# Altium PCB ST-LINK-PCB.PcbDoc
Units mil, origin at the board's own origin, x right, y up, seen from the top; angles counter-clockwise.
Board outline 1968.5 x 590.55 mil, 4 copper layers (Top Layer, GND02, VCC03, Bottom Layer), stack 23.756 mil thick; 54 components, 49 nets, 187 pads, 104 vias.
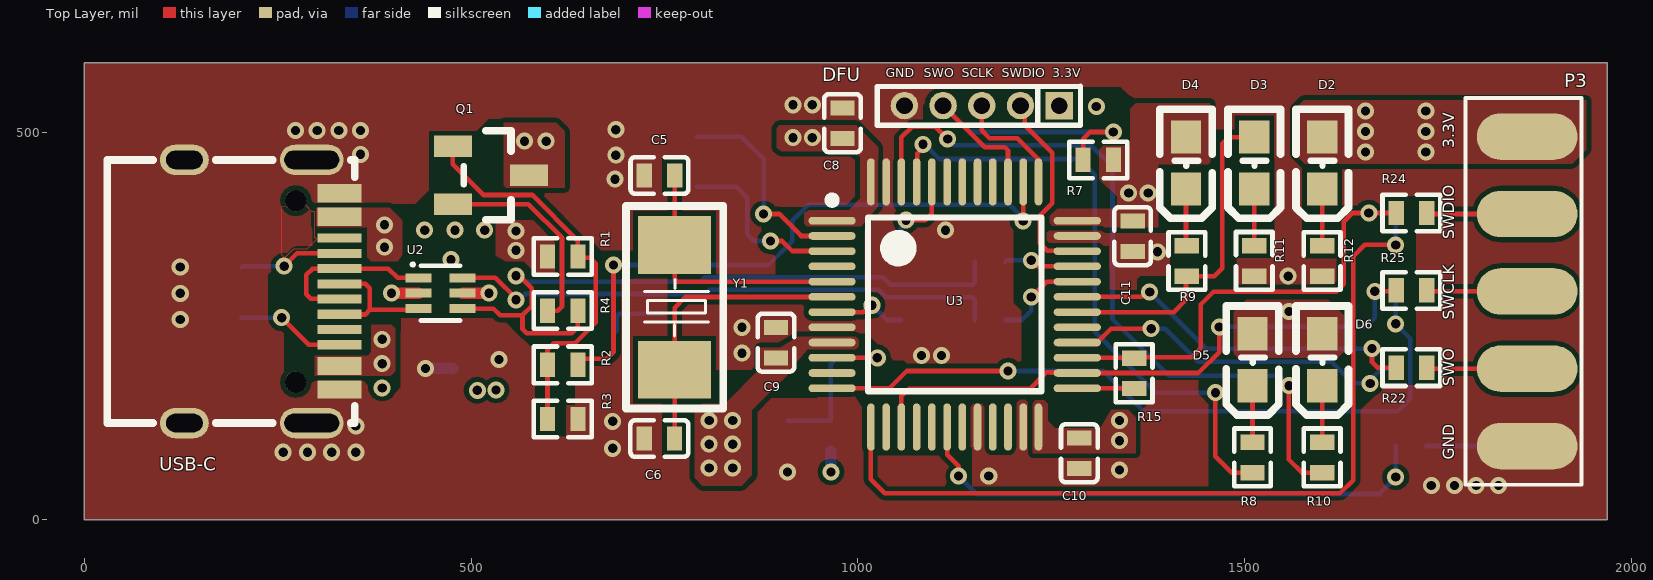
[diagram p0: Top Layer view]
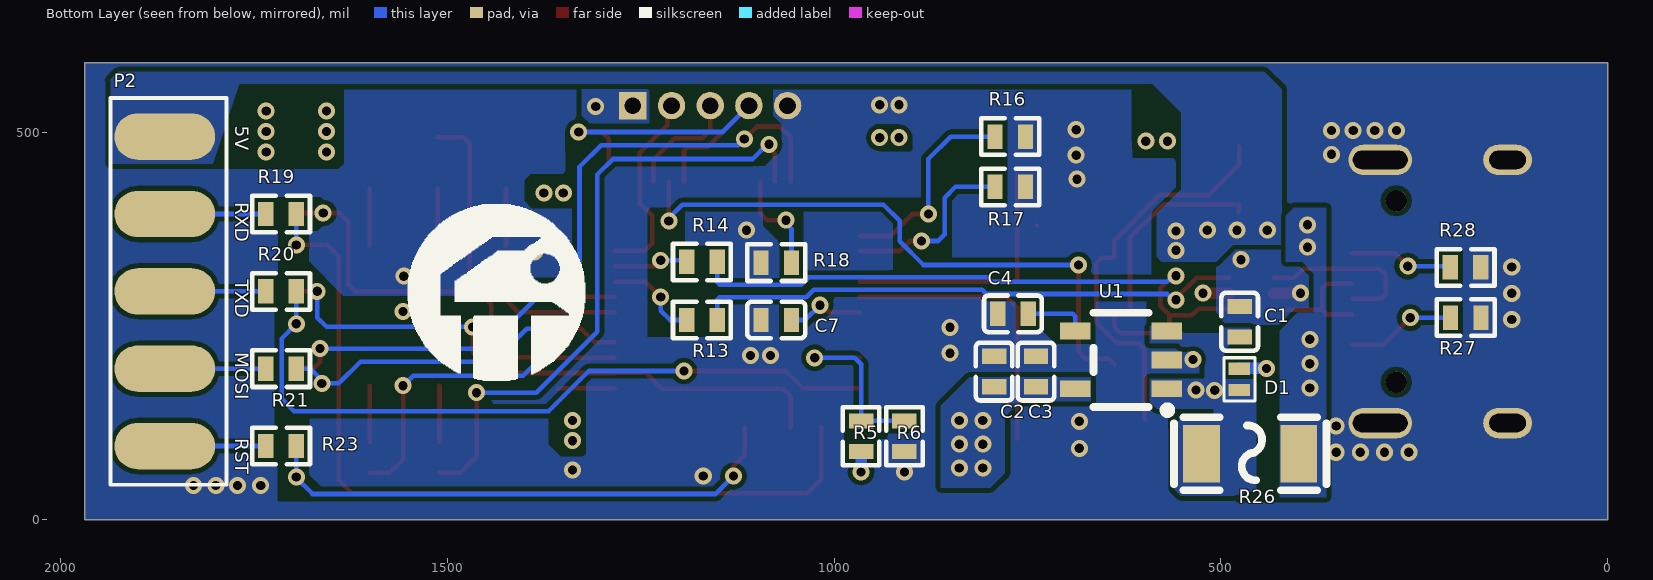
[diagram p1: Bottom Layer view, seen from below]
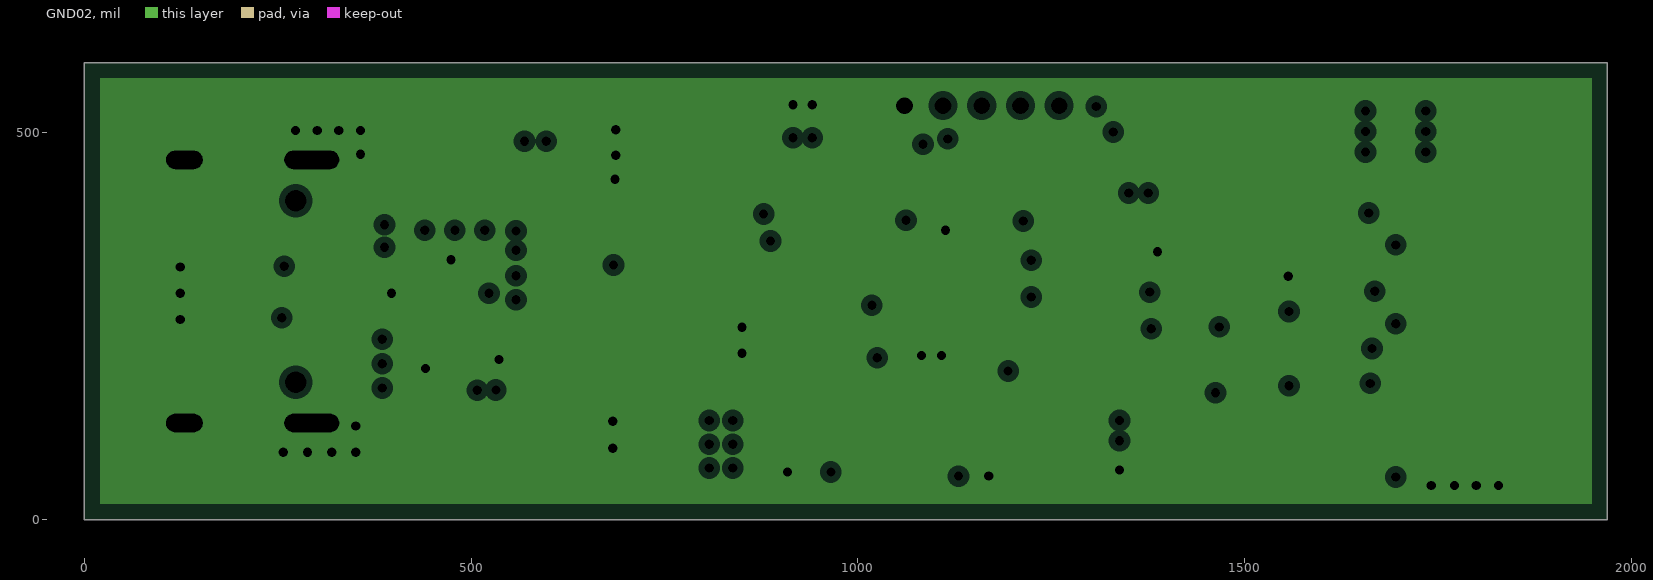
[diagram p2: GND02, clearances drawn from the general rule]
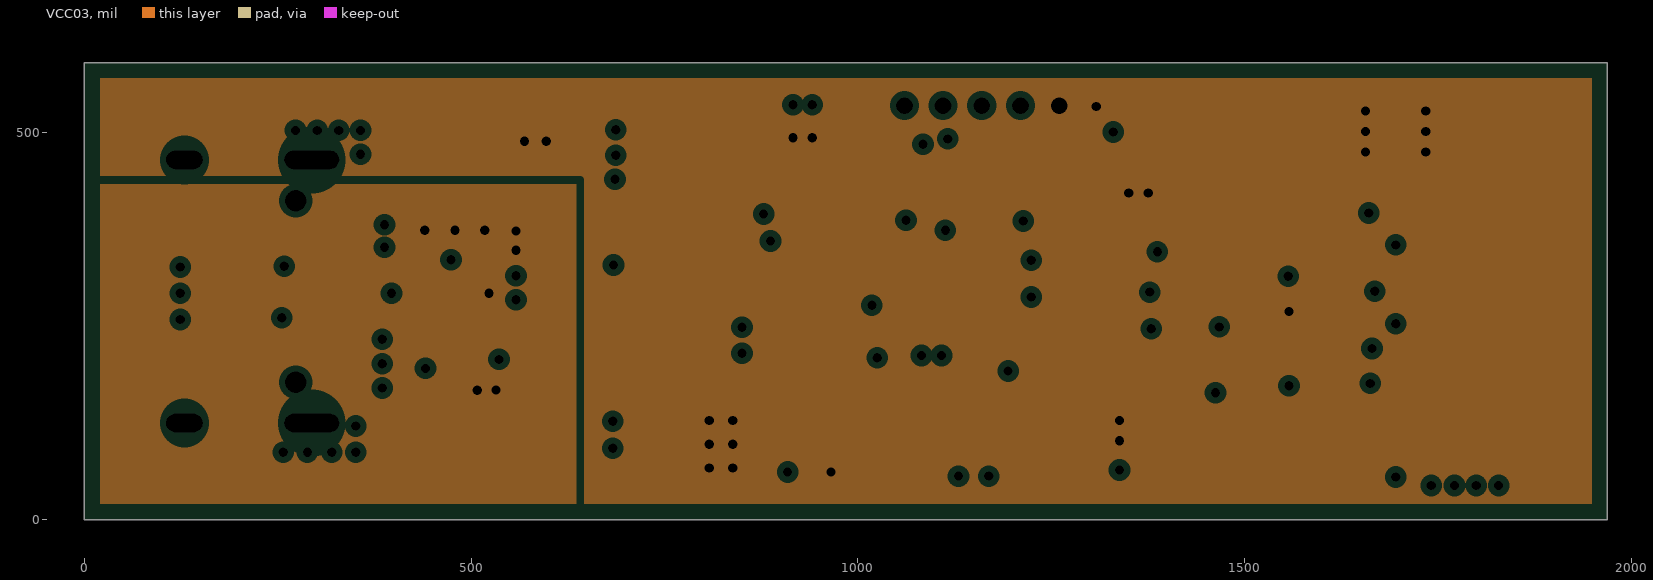
[diagram p3: VCC03, clearances drawn from the general rule]

## Layer stack, top to bottom
Top Solder: solder mask 0.4, Solder Resist, Dk 3.5
Top Layer: signal copper 1.4
Dielectric 2: prepreg 2.8, PP-006, Dk 4.1
GND02: plane copper 1.3779, net GND
Dielectric 1: dielectric 12.6, FR-4, Dk 4.8
VCC03: plane copper 1.3779, net (Multiple Nets)
Dielectric 3: prepreg 2.8, PP-006, Dk 4.1
Bottom Layer: signal copper 1.4
Bottom Solder: solder mask 0.4, Solder Resist, Dk 3.5

## Board outline
0,0 1968.5,0 1968.5,590.55 0,590.55

## Design rules (kind name [scope] priority, off if disabled: settings)
Clearance [All] p1: gap=6 ignorepadtopadclearanceinfootprint=FALSE
DiffPairsRouting [All] p1: maxlimit=10 minlimit=10 mostfreqgap=10 toplayer_minwidth=6 toplayer_maxwidth=6 toplayer_prefwidth=6 bottomlayer_minwidth=6 bottomlayer_maxwidth=6 bottomlayer_prefwidth=6 maxuncoupledlength=500
PlaneClearance [All] p1: clearance=8
PlaneConnect [All] p1: planeconnectstyle=Direct reliefexpansion=20 reliefentries=4 reliefconductorwidth=10 reliefairgap=10
PolygonConnect [All] p1: connectstyle=Direct reliefconductorwidth=10 reliefentries=4 polygonreliefangle="90 Angle" airgapwidth=10
RoutingVias [All] p1: holewidth=12 width=22 viastyle="Through Hole" minholewidth=12 minwidth=22 maxholewidth=12 maxwidth=22
SilkToSilkClearance [All] p1: silktosilkclearance=2
SilkToSolderMaskClearance [IsPad] p1: minsilkscreentomaskgap=2 clearancetoexposedcopper=TRUE
SolderMaskExpansion [All] p1: expansion=4
Width PWR [InNetClass('PWR')] p1: maxlimit=60 minlimit=6 preferedwidth=15
Width [InNetClass('All Nets')] p2: maxlimit=6 minlimit=6 preferedwidth=6
25 further rules are at their usual default settings.

## Classes and differential pairs
net class PWR: 3.3V 5V GND VBUS
differential pair USB: +USB_P -USB_N

## Components (designator, comment, footprint, x,y, rotation, side; value= is the part's Value field where it differs from the comment)
C1 "Cap" 0402C 475.63,256.04 r270 bottom value=0.1uF
C2 "Cap" 0402C 793,191.67 r270 bottom value=0.1uF
C3 "Cap" 0402C 739,191.67 r270 bottom value=0.1uF
C4 "Cap" 0402C 769.04,266 r180 bottom value=0.1uF
C5 "Cap" 0402C 743,444.74 r0 top value=22pF
C6 "Cap" 0402C 742.96,104.74 r0 top value=22pF
C7 "Cap" 0402C 1075.04,258 r180 bottom value=0.1uF
C8 "Cap" 0402C 980,512.67 r270 top value=0.1uF
C9 "Cap" 0402C 894,229 r270 top value=0.1uF
C10 "Cap" 0402C 1286,85.33 r90 top value=0.1uF
C11 "Cap" 0402C 1355,365.96 r90 top value=0.1uF
D1 "DESD5V0S1BL-7B" DESD5V0S1BL-7B 476,181.27 r90 bottom
D2 "LED" 0603LED 1600,464.37 r90 top
D3 "LED" 0603LED 1512.18,464.37 r90 top
D4 "LED" 0603LED 1424,464.37 r90 top
D5 "LED" 0603LED 1510,210 r90 top
D6 "LED" 0603LED 1600,210 r90 top
DFU "P_TOP" SIP5-1.27 1210,535 r0 top
P2 "P_BOTTOM" "HEADER 5" 1865,495 r270 bottom
P3 "P_TOP" "HEADER 5" 1865,95 r90 top
Q1 "S9013_NPN" SOT-23-3 519.61,442.48 r180 top
R1 "Res1" 0402R 617.96,340.06 r0 top value=10K
R2 "Res1" 0402R 617.96,200.06 r0 top value=100R
R3 "Res1" 0402R 617.96,130.06 r0 top value=36K
R4 "Res1" 0402R 617.96,270.06 r0 top value=1.5K
R5 "Res2" 0402R 965,108.17 r270 bottom value=4.7K
R6 "Res2" 0402R 909,107.46 r90 bottom value=4.7K
R7 "Res2" 0402R 1310.33,464.92 r0 top value=4.7K
R8 "Res2" 0402R 1510,79.96 r90 top value=1K
R9 "Res2" 0402R 1425,334.53 r270 top value=1.5K
R10 "Res2" 0402R 1600,79.96 r90 top value=1K
R11 "Res2" 0402R 1512.18,333.96 r90 top value=1.5K
R12 "Res2" 0402R 1600,333.82 r90 top value=1K
R13 "Res2" 0402R 1170.33,258 r0 bottom value=22R
R14 "Res2" 0402R 1170.33,333 r0 bottom value=22R
R15 "Res2" 0402R 1357,189.3 r270 top value=100R
R16 "Res1" 0402R 772.67,495 r180 bottom value=10K
R17 "Res1" 0402R 772.67,430 r180 bottom value=10K
R18 "Res2" 0402R 1075.04,332 r180 bottom value=10K
R19 "Res2" 0402R 1714.33,395 r0 bottom value=22R
R20 "Res2" 0402R 1714.33,295 r0 bottom value=22R
R21 "Res2" 0402R 1714.33,195 r0 bottom value=22R
R22 "Res2" 0402R 1714.96,196.3 r0 top value=22R
R23 "Res2" 0402R 1714.33,95 r0 bottom value=22R
R24 "Res2" 0402R 1714.96,396.3 r0 top value=22R
R25 "Res2" 0402R 1714.96,296.3 r0 top value=22R
R26 "PTC 1A" PTC_1A 463.78,84.51 r0 bottom
R27 "Res2" 0402R 182.96,261 r0 bottom value=5.1K
R28 "Res2" 0402R 183.33,325.99 r0 bottom value=5.1K
U1 "SPX3819" SPX3819 630.31,206.4 r0 bottom
U2 "USBLC6-2P6" USBLC6-2P6 460.75,290.97 r0 top
U3 "STM32F103CBT6" LQFP48_L 1125,278 r0 top
USB-C "TYPEC-304-BCP16" TYPE-C-16P 179.7,295.35 r270 top
Y1 "XTAL_8M" SMD-5032_2P 763,273.44 r90 top

## Footprints (in the part's own frame and the unit in brackets; to place one, negate y for a bottom-side part, rotate by r counter-clockwise, add the part's x,y. Pads: shape width x height; smd on the part's side, far side on the other; paste and mask are expansions set on the pad)
0402C [mm] "0402C"
  rect 0.5x0.8 smd: 1(-0.491,0) 2(0.509,0)
  silkscreen extent -0.94,-0.6 0.96,0.6
0402R [mm] "0402R"
  rect 0.5x0.8 smd: 1(-0.491,0) 2(0.509,0)
  silkscreen extent -0.94,-0.6 0.96,0.6
0603LED [mil] "0603LED"
  rect 43x39 smd: 1(30,0) 2(-37,0)
  silkscreen extent -75,-34 66,34
DESD5V0S1BL-7B [mm] "1CHANNEL_ESD"
  rect 0.4x0.7 smd: 1(-0.351,0) 2(0.349,0)
  silkscreen extent -0.71,-0.51 0.71,0.51
"HEADER 5" [mil]
  oval 60x130 smd: 1(0,0) 2(100,0) 3(200,0) 4(300,0) 5(400,0)
  silkscreen extent -50,-70 450,80, body extent -50,-406 450,48, height 70
LQFP48_L [mm] "Thin QFP, 48-Leads, Body 7x7mm, Pitch 0.5mm, IPC High Density"
  oval 1.55x0.25 smd: 1(-4.025,2.75) 2(-4.025,2.25) 3(-4.025,1.75) 4(-4.025,1.25) 5(-4.025,0.75) 6(-4.025,0.25) 7(-4.025,-0.25) 8(-4.025,-0.75) 9(-4.025,-1.25) 10(-4.025,-1.75) 11(-4.025,-2.25) 12(-4.025,-2.75) 25(4.025,-2.75) 26(4.025,-2.25) 27(4.025,-1.75) 28(4.025,-1.25) 29(4.025,-0.75) 30(4.025,-0.25) 31(4.025,0.25) 32(4.025,0.75) 33(4.025,1.25) 34(4.025,1.75) 35(4.025,2.25) 36(4.025,2.75)
  oval 0.25x1.55 smd: 13(-2.75,-4.025) 14(-2.25,-4.025) 15(-1.75,-4.025) 16(-1.25,-4.025) 17(-0.75,-4.025) 18(-0.25,-4.025) 19(0.25,-4.025) 20(0.75,-4.025) 21(1.25,-4.025) 22(1.75,-4.025) 23(2.25,-4.025) 24(2.75,-4.025) 37(2.75,4.025) 38(2.25,4.025) 39(1.75,4.025) 40(1.25,4.025) 41(0.75,4.025) 42(0.25,4.025) 43(-0.25,4.025) 44(-0.75,4.025) 45(-1.25,4.025) 46(-1.75,4.025) 47(-2.25,4.025) 48(-2.75,4.025)
  silkscreen extent -4.15,-2.85 2.85,3.55, body extent -3.5,-3.5 3.5,3.5, height 1.6
PTC_1A [mm] "PTC_1A"
  rect 1.2x1.9 smd: 1(-1.645,-0.012) 2(1.555,-0.012)
  silkscreen extent -2.55,-1.21 2.45,1.19
SIP5-1.27 [mm]
  rect 0.9x0.9 hole 0.55: 1(1.27,0)
  round 0.9 hole 0.55: 2(0,0) 3(-1.27,0) 4(-2.54,0) 5(-3.81,0)
  silkscreen extent -4.7,-0.64 1.97,0.64
SMD-5032_2P [mm] "8M XTAL"
  rect 1.9x2.4 smd: 1(-2.027,0) 2(2.073,0)
  silkscreen extent -3.3,-1.6 3.35,1.6
SOT-23-3 [mm] "S9013_NPN"
  rect 1.25x0.7 smd: 1(1.092,-1.014) 2(1.092,0.886) 3(-1.407,-0.064)
  silkscreen extent -0.81,-1.52 0.74,1.4
SPX3819 [mm] "SPX3819_5VTO3V3_LDO"
  rect 1x0.55 smd: 1(-1.532,0.95) 2(-1.532,0) 3(-1.532,-0.95) 4(1.468,-0.95) 5(1.468,0.95)
  silkscreen extent -1.68,-1.55 0.87,1.78
TYPE-C-16P [mm] "TYPE-C-16P"
  oval 1x2.099 hole 0.6 slot 1.8 at 90 deg: 13(-4.307,2.903) 14(4.333,2.903)
  oval 1x1.599 hole 0.6 slot 1.2 at 90 deg: 15(-4.307,-1.277) 16(4.333,-1.277)
  rect 0.6x1.45 smd: A1B12(-3.212,3.817) A4B9(-2.437,3.817) B1A12(3.233,3.817) B4A9(2.463,3.817)
  rect 0.3x1.45 smd: A5(-1.238,3.818) A6(-0.237,3.817) A7(0.263,3.817) A8(1.263,3.817) B5(1.763,3.817) B6(0.763,3.817) B7(-0.737,3.817) B8(-1.737,3.817)
  round 0.7 hole 0.7 unplated: ""(-2.967,2.372) ""(2.993,2.372)
  silkscreen extent -4.3,-3.81 4.33,4.32
USBLC6-2P6 [mm] "ESD PROTECTION"
  rect 0.85x0.3 smd: 1(-0.732,0.544) 2(-0.732,0.044) 3(-0.732,-0.456) 4(0.718,-0.456) 5(0.718,0.044) 6(0.718,0.544)
  silkscreen extent -0.92,-0.86 0.64,0.98

## Part data
C1 C2 C3 C4 C5 C6 C7 C8 C9 C10 C11: "Capacitor", LatestRevisionDate=17-Jul-2002, LatestRevisionNote="Re-released for DXP Platform.", PackageDescription="Radial Cap, Thru-Hole; 2 Leads; 0.3 in Pin Spacing", PackageReference=RAD-0.3, Published=8-Jun-2000, Publisher="Altium Limited"
D1: "1CHANNEL ESD"
D2 D3 D4 D5 D6: "Typical RED, GREEN, YELLOW, AMBER GaAs LED", LatestRevisionDate=17-Jul-2002, LatestRevisionNote="Re-released for DXP Platform.", PackageDescription="SM LED; 2 Flat Leads", PackageReference=3.2X1.6X1.1, PackageVersion=Feb-2002, Published=8-Jun-2000, Publisher="Altium Limited"
DFU P2 P3: library part "Header 5", "Header, 5-Pin", LatestRevisionDate=17-Jul-2002, LatestRevisionNote="Re-released for DXP Platform.", Publisher="Altium Limited"
Q1: library part S9013, PackageDocument=Sep-1998, Code_JEDEC=TO-92A, DatasheetDocument=1997, LatestRevisionDate=15-Jan-2003, LatestRevisionNote="PCB Footprint 'BCY-W3/D4.7' replaced", PackageReference=TO-92A, Published=8-Jun-2000, Publisher="Altium Limited"
R1 R2 R3 R4 R16 R17: "贴片电阻", LatestRevisionDate=17-Jul-2002, LatestRevisionNote="Re-released for DXP Platform.", PackageReference=AXIAL-0.4, Published=8-Jun-2000, Publisher="Altium Limited"
R5 R6 R7 R8 R9 R10 R11 R12 R13 R14 R15 R18 R19 R20 R21 R22 R23 R24 R25: "Resistor", LatestRevisionDate=17-Jul-2002, LatestRevisionNote="Re-released for DXP Platform.", PackageDescription="Axial Device, Thru-Hole; 2 Leads; 0.4 in Pin Spacing", PackageReference=AXIAL-0.4, Published=8-Jun-2000, Publisher="Altium Limited"
R26: library part PTC保险
R27 R28: library part Res, "Resistor", LatestRevisionDate=17-Jul-2002, LatestRevisionNote="Re-released for DXP Platform.", PackageDescription="Axial Device, Thru-Hole; 2 Leads; 0.4 in Pin Spacing", PackageReference=AXIAL-0.4, Published=8-Jun-2000, Publisher="Altium Limited"
U1: "SPX3819_5VTO3V3_LDO"
U2: "ESD PROTECTION"
U3: "STM32 ARM-based 32-bit MCU with 128 Kbytes Flash, 48-pin LQFP, Industrial Temperature", ComponentLink1Description="Manufacturer Link", ComponentLink1URL=www.st.com/stm32, ComponentLink2Description=Datasheet, ComponentLink2URL=http://www.st.com/stonline/products/literature/ds/13587.pdf, DatasheetVersion="rev6, Mar-2008", PackageDescription="48-Pin Low-Profile Quad Flat Pack, 7 x 7 mm Body, 0.5 mm Pitch (LQFP48)", PackageReference=LQFP48, PackageVersion=Mar-2008, Published=30-May-2008, Publisher="Altium Limited"
USB-C: "TYPEC-16P"
Y1: library part XTAL

## Via types
v1: diameter 22, hole 12, Top Layer to Bottom Layer, tented both sides, 104 vias

## Nets (pads, with @x,y where several pads share a name; then routed paths per layer and width w, separated by ;. In a path a pad name is that pad's centre, name@x,y a point inside that pad or via, vN(x,y) a via of type N, cw(c..) or ccw(c..) an arc to the next point about the centre after c; other vN are vias at no path point)
3.3V: C2.2 C3.2 C8.2 C9.2 C10.2 C11.2 D2.1 D4.1 D5.1 D6.1 DFU.1 P3.5 Q1.3 R5.2 R7.2 U1.5 U3.1 U3.9 U3.24 U3.36 U3.48 | length 26.6
  Bottom Layer w15: v1(965,61.5) R5.2
  other v1: 807.65,66.75 838,66.75 807.65,97.38 838,97.38 1338.05,102 807.65,128 838,128 1338.05,128 1557,269 1349.88,422 1375,422 1656,475 1734,475 569,489 597,489 916,493.57 941,493.57 1656,501.5 1734,501.5 1656,528 1734,528 1308,534
5V: C1.2 D1.1 P2.1 R1.1 R26.2 U1.1 U1.3 U2.5 | length 34
  Top Layer w15: U2.5 v1(523,292.69)
  other v1: 508,167 532,167.44 558,348 558,373 440,374 479,374 517.5,374
BOOT0: R18.2 U3.44 | length 135.9
  Top Layer w6: v1(1062,387) 1087,387 1095.47,395.47 U3.44
  Bottom Layer w6: R18.2 1055,375.67 1062,382.67 v1(1062,387)
D+: U2.3 USB-C.A6 USB-C.B6 | length 175
  Top Layer w6: USB-C.B6 330.32,265 363,265 369,271 ; USB-C.A6 330.31,305 363,305 369,299 369,271 ; U2.3 429.91,271 369,271
D-: U2.1 USB-C.A7 USB-C.B7 | length 223.3
  Top Layer w6: USB-C.A7@329.46,285.54 292.46,285.54 287,291 287,316.37 295,324.37 USB-C.B7 393,324.37 405,312.37 U2.1
GND: C1.1 C2.1 C3.1 C4.1 C5.1 C6.1 C7.1 C8.1 C9.1 C10.1 C11.1 D1.2 DFU.5 P3.1 R3.2 R6.1 R11.1 R12.1 R16.2 R17.2 R18.1 R27.1 R28.1 U1.2 U2.2 U3.8 U3.20 U3.23 U3.35 U3.47 USB-C.13 USB-C.14 USB-C.15 USB-C.16 USB-C.A1B12 USB-C.B1A12 | length 70.1
  Top Layer w15: v1(397,292.69) U2.2
  Bottom Layer w15: v1(441,195.37) 475.63,195.37 D1.2
  other v1: 1741,44 1771,44 1799,44 1828,44 1169,56.19 909,61.5 1338,64 257,87 288.33,87 319.67,87 351,87 683,92.15 351,121 683,127 536.04,207 1082,212.1 1107.9,212.1 850,215 850,248.4 124,258.5 124,292.5 1556.1,314.55 124,326.5 474,336 1387,346 1113,374 686,440 687,471 357,472 273,503 301,503 329,503 357,503 687,504 916,536 941,536
NetC4_2: C4.2 U1.4 | length 81
  Bottom Layer w6: U1.4 688.11,262.49 691.62,266 C4.2
NetC7_2: C7.2 U3.7 | length 100
  Top Layer w6: U3.7 1006.97,268.16 1015.81,277 v1(1018,277)
  Bottom Layer w6: v1(1018,277) 1037,258 C7.2
NetD2_2: D2.2 R12.2 | length 73.5
  Top Layer w6: R12.2 D2.2
NetD3_2: D3.2 R11.2 | length 73.4
  Top Layer w6: R11.2 D3.2
NetD4_2: D4.2 R9.1 | length 73.9
  Top Layer w6: D4.2 1424,354.86 R9.1
NetD5_2: D5.2 R8.2 | length 73
  Top Layer w6: R8.2 D5.2
NetD6_2: D6.2 R10.2 | length 73
  Top Layer w6: R10.2 D6.2
NetQ1_1: Q1.1 R1.2 R2.1 R3.1 | length 516.2
  Top Layer w6: Q1.1 476,481.8 476,459.31 515.71,419.6 578.84,419.6 638,360.44 R1.2 639.77,338.28 653.72,338.28 661,331 661,254.75 634.25,228 607,228 598.63,219.63 R2.1 R3.1
NetQ1_2: Q1.2 R4.1 | length 278.8
  Top Layer w6: Q1.2@477,397.5 477,407.2 Q1.2 573.87,407.6 617.47,364 617.47,275.47 612.06,270.06 R4.1
NetR5_1: R5.1 R6.2 U3.10 | length 251.3
  Top Layer w6: U3.10 v1(1025,209.1)
  Bottom Layer w6: R6.2 R5.1 965,201 973.1,209.1 v1(1025,209.1)
NetR13_2: R13.2 U3.32 | length 124
  Top Layer w6: v1(1224,287.65) 1243.87,307.53 U3.32
  Bottom Layer w6: R13.2 1212,258 1224,270 v1(1224,287.65)
NetR14_2: R14.2 U3.33 | length 97.1
  Top Layer w6: v1(1224,335) 1231.79,327.21 U3.33
  Bottom Layer w6: R14.2 1192.37,335 v1(1224,335)
NetR16_1: R16.1 U3.2 | length 269.3
  Top Layer w6: v1(878,395) 898,395 926.42,366.58 U3.2
  Bottom Layer w6: R16.1 849,495 878,466 v1(878,395)
NetR17_1: R17.1 U3.3 | length 236.5
  Top Layer w6: v1(887,360) 902.14,360 914.98,347.16 966.27,347.16 U3.3
  Bottom Layer w6: R17.1 843,430 857,416 857,369 866,360 v1(887,360)
NetR27_2: R27.2 USB-C.B5 | length 141.5
  Top Layer w6: v1(255.03,261) 290.08,225.94 USB-C.B5
  Bottom Layer w6: R27.2 v1(255.03,261)
NetR28_2: R28.2 USB-C.A5 | length 134.2
  Top Layer w6: v1(258.37,327.58) 274.89,344.1 329.81,344.1 329.92,344 USB-C.A5
  Bottom Layer w6: R28.2 204.97,327.58 v1(258.37,327.58)
OS_IN: C5.2 U3.5 Y1.2 | length 338.7
  Top Layer w6: Y1.2@738,380.06 Y1.2@738.04,380.1 ; Y1.2 763,311.04 766.51,307.53 U3.5 ; Y1.2 C5.2
OS_OUT: C6.2 U3.6 Y1.1 | length 378.5
  Top Layer w6: C6.2 Y1.1 763,274 776.65,287.65 966.35,287.65 U3.6
P_MOSI: P2.4 R21.2 | length 130.6
  Bottom Layer w6: R21.2 P2.4
P_NRST: P2.5 R23.2 | length 130.6
  Bottom Layer w6: R23.2 P2.5
P_RXD: P2.2 R19.2 | length 130.6
  Bottom Layer w6: R19.2 P2.2
P_SWCLK: P3.3 R25.2 | length 130.5
  Top Layer w6: R25.2 1736.3,295 P3.3
P_SWDIO: P3.4 R24.2 | length 130.5
  Top Layer w6: R24.2 1736.3,395 P3.4
P_SWO: P3.2 R22.2 | length 130.5
  Top Layer w6: R22.2 1736.3,195 P3.2
P_TXD: P2.3 R20.2 | length 130.6
  Bottom Layer w6: R20.2 P2.3
RX_LED: R10.1 U3.46 | length 963.9
  Top Layer w6: U3.46 1056.1,494.1 1070,508 1100,508 v1(1116,492) ; v1(1557,173) 1557,77.63 1574,60.63 R10.1
  Bottom Layer w6: v1(1116,492) 1124,484 1301,484 1329,456 1329,259 1402,186 1544,186 v1(1557,173)
STA_LED: D3.1 R9.2 U3.30 | length 434
  Top Layer w6: U3.30 1408.16,268.16 1424,284 1424,313.49 R9.2 1460.49,314.49 1471,325 1471,486 1479.37,494.37 D3.1
SWCLK0: DFU.3 U3.37 | length 150
  Top Layer w6: DFU.3 1160,503 1170,493 1206,493 1233.27,465.73 U3.37
SWDIO0: DFU.2 U3.34 | length 254.3
  Top Layer w6: DFU.2 1215.63,529.37 1215.63,509.4 1251,474.04 1251,408.92 1235,392.92 1235,357 1244.37,347.63 1282.73,347.63 U3.34
SWO0: DFU.4 R7.1 U3.39 | length 452.5
  Top Layer w6: DFU.4 1164,481 1189.9,481 1193.9,477 U3.39 U3.39@1193.9,436.28 ; R7.1 1291,492 1300,501 v1(1330,501)
  Bottom Layer w6: DFU.4 1144,501 v1(1330,501)
T_JTCK: R25.1 U3.15 U3.26 | length 775.7
  Top Layer w6: U3.15 1056.1,159.29 1066,169.19 1222.51,169.19 1243.51,190.19 1249.51,190.19 1249.55,190.15 1282.73,190.15 U3.26 1440,189.42 1467,216.42 v1(1467,249) ; v1(1668,295) 1694.33,295 R25.1
  Bottom Layer w6: v1(1467,249) 1656,249 1668,261 v1(1668,295)
T_JTMS: R15.1 R24.1 U3.27 | length 570.5
  Top Layer w6: U3.27 1356.53,209.1 R15.1 1358.37,210 1431.49,210 1443,221.51 1443,278 1459.55,294.55 1618.39,294.55 1628,304.16 1628,385 1639.3,396.3 v1(1660.3,396.3) R24.1
T_MOSI: R21.1 U3.28 | length 458.4
  Top Layer w6: U3.28@1283.64,228.96 1309.23,228.96 1326.99,246.72 v1(1379,246.72)
  Bottom Layer w6: v1(1379,246.72) 1397.28,246.72 1440,204 1612,204 1640,176 v1(1662,176) 1662,180.33 1676.67,195 R21.1
T_NRST: R23.1 U3.18 | length 693.9
  Top Layer w6: U3.18 1115.16,83.84 1130,69 v1(1130,56.19)
  Bottom Layer w6: v1(1130,56.19) 1153,33.19 1153,33 1674,33 1695,54 v1(1695,55) R23.1
T_RXD: R19.1 U3.13 | length 1095.8
  Top Layer w6: U3.13 1016.37,119.17 1016.37,52.37 1034.73,34 1623,34 1640,51 1640,340 1655,355 v1(1695,355)
  Bottom Layer w6: v1(1695,355) R19.1
T_SWDIO_IN: R15.2 U3.25 | length 73.7
  Top Layer w6: U3.25 1356.53,169.73 R15.2
T_SWO: R22.1 U3.31 | length 465.4
  Top Layer w6: U3.31 1366.51,287.84 1372.67,294 v1(1377,294) ; v1(1664.47,221) 1664.47,203.53 1671.7,196.3 R22.1
  Bottom Layer w6: v1(1377,294) 1450,221 v1(1664.47,221)
T_TXD: R20.1 U3.12 | length 931.7
  Top Layer w6: U3.12 1040.73,169.73 1063,192 v1(1194,192)
  Bottom Layer w6: v1(1194,192) 1317,192 1369,140 1698,140 1714,156 1714,234 v1(1695,253) R20.1
TX_LED: R8.1 U3.45 | length 820.9
  Top Layer w6: U3.45 1076.52,437.2 1076.52,473.19 1084,480.67 v1(1084,485) ; v1(1462,164) 1462,81.63 1483,60.63 R8.1
  Bottom Layer w6: v1(1084,485) 1086.28,485 1105.31,465.97 1286.03,465.97 1306,446 1306,243 1385,164 v1(1462,164)
USB_N: R13.1 U2.6 | length 711.9
  Top Layer w6: U2.6 489.32,312.69 531.28,312.69 558,285.97 v1(558,284)
  Bottom Layer w6: v1(558,284) 562.01,284 569.51,291.5 803.15,291.5 808.65,297 1026.28,297 1035.78,287.5 1147.49,287.5 1151,283.99 R13.1
USB_P: R4.2 R14.1 U2.4 | length 893.5
  Top Layer w6: U2.4 489.31,272.69 528.87,272.69 537.56,264 566.28,264 ; v1(558,315) 562.33,315 578.33,299 578.33,276.05 566.28,264 ; R4.2 638,249 630,241 572,241 566.28,246.72 566.28,264
  Bottom Layer w6: v1(558,315) 562.01,315 569.51,307.5 796.52,307.5 802.02,313 1032.91,313 1042.41,303.5 1147.49,303.5 1151,307.01 R14.1
USB_RENM: R2.2 U3.38 | length 804.4
  Top Layer w6: R2.2 638,200.88 644.84,207.72 675.49,207.72 684,216.23 v1(684,329) ; v1(1213.58,386) U3.38
  Bottom Layer w6: v1(684,329) 884.28,329 915,359.72 915,386 936,407 1196,407 1213.58,389.42 v1(1213.58,386)
VBUS: R26.1 USB-C.A4B9 USB-C.B4A9
  other v1: 385,170 385,201.5 385,233 388,352 388,381
pads on no net: U3.4 U3.11 U3.14 U3.16 U3.17 U3.19 U3.21 U3.22 U3.29 U3.40 U3.41 U3.42 U3.43 USB-C. USB-C.A8 USB-C.B8

## Polygon pours and split planes (outlines as drawn)
no net on Top Layer "Top Layer-No Net 8" (solid, pour order 126): 254.48,404.45 254.48,342.63 259,338.1 270.9,350 288.18,350 300.5,362.32 298,364.82 298,397.91 294.06,397.91 285.97,406
GND on Top Layer "Top Layer-GND 8" (solid, pour order 122): 0,591 1969,591 1969,0 0,0
GND on Top Layer "Top Layer-GND" (solid, pour order 118): 623,148 623,80.91 634.24,70 731,70 738.63,77.63 740,77.63 740,131 726,148
GND on Top Layer "Top Layer-GND 1" (solid, pour order 114): 300,408.92 362,409 379,426 379,508 366,521 253,521 242,510 242,448 255,435 294,435 300,429
GND on Top Layer "Top Layer-GND 2" (solid, pour order 112): 297,179 361,179 366.23,173.77 366.23,69.23 358,61 243,61 227,77 227,140.29 240,153 290,153 297,160
no net on Top Layer "Top Layer-No Net 4" (solid, pour order 110): 298,186
3.3V on Top Layer "Top Layer-3.3V" (solid, pour order 104): 997.97,236 922,236 899,222 873,222 873,194.64 828.36,150 798.71,150 789,140.29 789,54 799,44 850,44 863,57 863,141.42 916,194.42 916,198.68 935,220 997,220 1001,224 1001,233
no net on Top Layer "Top Layer-No Net 5" (solid, pour order 100): 792,113
GND on Top Layer "Top Layer-GND 3" (solid, pour order 98): 1359.41,77 1359.41,47 1215,47 1205,57 1205,151 1209,155 1217,155 1220,152 1220,83 1226,77
no net on Top Layer "Top Layer-No Net 6" (solid, pour order 96): 1359.41,78.5
3.3V on Top Layer "Top Layer-3.3V 1" (solid, pour order 94): 1327.1,142 1313.21,118 1255,118 1245,128 1245,150 1241,154 1229.43,154 1226,150 1226,86 1247.55,86 1359,86 1359,132 1349,142
GND on Top Layer "Top Layer-GND 4" (solid, pour order 92): 1930,131 1940,121 1940,43 1924,27 1730,27 1719,38 1719,119 1731,131
3.3V on Top Layer "Top Layer-3.3V 2" (solid, pour order 90): 1486,268.47 1486,214.1 1491.1,209 1619.9,209 1628,217.1 1628,264 1608,284 1501.53,284
3.3V on Top Layer "Top Layer-3.3V 3" (solid, pour order 88): 1565,531 1565,471.95 1565.47,471.95 1577.21,460.21 1923.21,460.21 1941,478 1941,542 1576,542
3.3V on Top Layer "Top Layer-3.3V 4" (solid, pour order 86): 1352,483 1352,531 1359,538 1455,538 1455,461.42 1452.58,459 1388,459 1388,474.01 1379.01,483
GND on Top Layer "Top Layer-GND 5" (solid, pour order 84): 1254,372 1314.82,372 1316.82,370 1402,370 1402,324.04 1325,324.04 1325,354 1257,354 1250,361 1250,370
3.3V on Top Layer "Top Layer-3.3V 5" (solid, pour order 82): 1251,380 1316,380 1318,378 1388,378 1388,474.32 1379.01,483 1312.45,483 1312,482.55 1312,440 1335,417 1335,402 1257.53,402 1248,392.47 1248,383.46
GND on Top Layer "Top Layer-GND 6" (solid, pour order 80): 893,547 902,556 1074,556 1084,546 1084,517 1066,517 1046,497 1046,407 1041,402 1032,402 1030,404 1030,487 1023.43,493.57 999,518 893,518
3.3V on Top Layer "Top Layer-3.3V 6" (solid, pour order 78): 895,509.4 997.97,509.4 1026,481.37 1026,405 1004,379 934,379 930.5,382.5 930.5,396.4 937,400 988,400 1003,415 1003,468.9 993,475 991.33,476 900.55,476 895,480.36
no net on Top Layer "Top Layer-No Net 7" (solid, pour order 70): 665,423
GND on Top Layer "Top Layer-GND 7" (solid, pour order 68): 739,415 738,414 686,414 665,435 665,523 739,523
3.3V on Top Layer "Top Layer-3.3V 7" (solid, pour order 66): 542,432 545,429 621,429 621,502 610,513 542,513
5V on Top Layer "Top Layer-5V" (solid, pour order 56): 610,357 610,318.37 583.48,318.37 567.85,334 545,334 532,341 532,387 580,387
VBUS on Top Layer "Top Layer-VBUS" (solid, pour order 40): 300,403 395,403 411,387 411,342 405,334 371,334 366,339 366,378 302,378 300,380
no net on Top Layer "Top Layer-No Net 3" (solid, pour order 36): 300,403
VBUS on Top Layer "Top Layer-VBUS 1" (solid, pour order 34): 298,186 396,186 402,192 402,247 397,252 371,251.97 371,216.77 366.23,212 298,212
no net on Top Layer "Top Layer-No Net" (solid, pour order 22): 304,209
no net on Top Layer "Top Layer-No Net 1" (solid, pour order 16): 329,205
no net on Top Layer "Top Layer-No Net 2" (solid, pour order 10): 330,198.39
no net on Bottom Layer "Bottom Layer-No Net 1" (solid, pour order 144): 1039.16,353.75
5V on Bottom Layer "Bottom Layer-5V 3" (solid, pour order 142): 495.78,158.54 495.78,218.72 487.5,227 462,227 462,248 495,248 502,241 547.64,241 552,245.36 552,254 587.34,254 592,249.34 592,227.8 554.8,227.8 548.74,221.74 529.74,221.74 521,213 521,183.75 544.63,160.12
5V on Bottom Layer "Bottom Layer-5V" (solid, pour order 50): 483,31 552,31 561,40 561,121 551.94,130.06 513.94,130.06 509,135 509,143 583,143 592,152 592,181.99 459.48,182 454,176.52 454,37.9
GND on Bottom Layer "Bottom Layer-GND 3" (solid, pour order 124): 0,591 0,0 1969,0 1969,591
3.3V on Bottom Layer "Bottom Layer-3.3V 1" (solid, pour order 120): 1239,512 1316,512 1326,522 1326,556 1241,556 1239,554
GND on Bottom Layer "Bottom Layer-GND" (solid, pour order 116): 106,359 106.72,359.72 175.28,359.72 185,350 185,231 171,217 106,217
GND on Bottom Layer "Bottom Layer-GND 1" (solid, pour order 106): 715.5,194 859,194 867,202 867,277 862,282 775,282 767,274 767,237 762,232 718,232 710,224 710,200.21
GND on Bottom Layer "Bottom Layer-GND 2" (solid, pour order 72): 771,523 771,415 763,407 668,407 646,429 646,518 651,523
5V on Bottom Layer "Bottom Layer-5V 1" (solid, pour order 62): 1935,460 1935,567 1936,568 1925,579 444,579 421,556 421,355 551,355 551,526 589,564 590,563 1769,563 1803,460
5V on Bottom Layer "Bottom Layer-5V 2" (solid, pour order 64): 528.71,449.29 583,395 583,340 577,333 573,333 506,333 474.04,364.96
no net on Bottom Layer "Bottom Layer-No Net" (solid, pour order 58): 1803,465
3.3V on Bottom Layer "Bottom Layer-3.3V" (solid, pour order 54): 668,183 669,184 825,184 862,147 862,41 798,41 779,60 779,133 759,153 668,153
VBUS on Bottom Layer "Bottom Layer-VBUS" (solid, pour order 48): 406,403 416,393 416,333 395,333 380,318 380,267 401,267 424,244 424,29 364,29 364,403
GND on GND02 (split plane): 1948.41,20.1 20.1,20.1 20.1,570.45 1948.41,570.45
3.3V on VCC03 (split plane): 1948.41,20.1 646.1,20.1 646.1,21 646.1,439 645.71,440.95 644.6,442.6 642.95,443.71 641,444.1 20.1,444.1 20.1,570.45 1948.41,570.45
5V on VCC03 (split plane): 635.9,21 635.9,20.1 20.1,20.1 20.1,433.9 635.9,433.9

## Other copper
Top Layer:
  pour cut-out: 511.73,261.09 538.93,261.09 559.8,240.23 561,241.43 561,256 545.56,256 533.56,268 510,268
  pour cut-out: 242.36,320.95 237.7,316.29 237.7,261 275.99,261 278,263.01 278,314.49
  pour cut-out: 1639.3,405.48 1622.52,405.48 1622,406 1618.39,402.39 1618.39,397.24 1623.75,397.24 1627,393.99
  pour cut-out: 1004,240 1011.24,240 1032.24,219 1031.47,218.23 1006,218.23
  pour cut-out: 1006.53,373.55 1007.8,372.27 1007.8,290.63 1001.37,290.63 997,295 997.97,295.97 997.97,372.17
  pour cut-out: 901.51,403.48 933.98,403.48 930.5,399.99 930.5,382.55 917.45,382.55 906,394
  pour cut-out: 893.63,343.99 893.63,315 932,315 935,318 935,337.99 911.18,337.99 897.18,351.98 897.18,352.97
  pour cut-out: 582.78,178.31 582.78,151.81 589.45,151.81 589.45,178.31
  pour cut-out: 361,179 364.84,179 365.35,179.51 368.99,175.87 368.99,163.37
  pour cut-out: 363.61,176.39
  pour cut-out: 408.49,192 408.49,170.85 401.01,163.37 396,168.38 396,186
  pour cut-out: 1486.23,504 1486.68,503.55 1477.61,494.47 1463.57,494.47 1459,499.04 1459,504
  pour cut-out: 1349.17,548.83 1349.17,543.41 1350.59,542 1362,542
  pour cut-out: 1359.41,569
  pour cut-out: 1283.72,558.72 1339.28,558.72 1349.17,548.83 1349.17,538 1343.51,538 1315.69,510.18 1297.7,510.18 1275.15,487.63 1275.15,443.17 1305.51,443.17 1309.23,439.45 1309.23,407.2 1261.9,407.2 1260,409.09 1260,512.48 1282.52,512.48 1283.72,511.28
  pour cut-out: 1317.74,513.26 1348.74,544.25 1356,544.25 1356,535 1351,530 1351,510.46
  pour cut-out: 1293.51,507.49 1275.15,489.13 1275.15,473.35 1275,473.19
  pour cut-out: 1260.52,467 1260.52,511.95 1259.48,513 1257.76,511.28 1236.28,511.28 1236.28,522.65 1234.77,524.16 1228.29,524.16 1226,521.87 1226.1,521.77 1226.1,510.93 1259.48,477.55
  pour cut-out: 1260.52,467
  pour cut-out: 1262,471
  pour cut-out: 1305.51,443.17 1305,442.67 1305,405.68 1325.69,405.68 1328.51,408.49 1328.51,414.31
  pour cut-out: 1066.49,516.48 1066.49,517.49 1088,539 1100,527 1100,517.18
  pour cut-out: 1110,559.18 1110.46,558.72 1236.28,558.72 1236.28,538.72 1236,539 1103,539
  pour cut-out: 1101.96,388.98 1193.27,388.98 1196.25,386 1206,395.75 1206,404.4 1104.94,404.4 1100,409.34
  pour cut-out: 1201.33,373.74 1201.33,280 1213.32,268 1234,268 1234,371.41 1232,373.41
  pour cut-out: 1243.66,293.16 1225.89,275.4 1211.74,275.4 1211.74,186.43 1208.68,183.36 1209.5,182.54 1209.5,174.07 1223.67,174.07 1254.59,205 1257.87,205 1257.87,290.49 1250.53,297.83
  pour cut-out: 1318,251 1318,221.46 1324.46,215 1441.52,215 1451,224.48 1443,232.48 1443,278 1393.7,278 1389.51,282.19
  pour cut-out: 1249.55,358.03 1259.27,358.03 1259.27,356.32 1258.78,356.81 1249.55,356.81
  pour cut-out: 1254.27,358.03 1253.05,356.81 1246.05,356.81 1244.83,358.03
  pour cut-out: 1313.32,357.19 1321.81,357.19 1325,354 1321,350
  pour cut-out: 1318,371.51 1318.75,372.26 1340,372.26 1340,371.08 1338.25,369.32 1321,369.32
  pour cut-out: 1313.32,357.19 1321.81,357.19 1325.33,353.67 1325.33,298.01 1322.17,298.01 1321.18,297.02 1319.34,298.86 1319.34,303.27 1318.73,303.27 1314,308
  pour cut-out: 1360.27,297.02 1360.27,310.9 1364.77,315.4 1406,315.4 1406,307.47 1414.82,298.65 1414,297.83 1414,283 1411.58,283 1401,272.42 1398.42,275 1386,275 1386,278.68 1393.01,285.7 1393.01,300.63 1387.7,300.63 1377,311.33 1364.67,299 1363.96,299
  pour cut-out: 1403.25,298.65
  pour cut-out: 1574.5,399.87 1574.5,373.45 1578.25,369.69 1590.82,369.69 1590.82,403 1592,404.18
  pour cut-out: 1376.75,370.15 1376.9,370 1402,370 1402,369 1407,364 1407,356.21
  pour cut-out: 1390,448 1390.33,447.67 1390.33,371 1394.25,371 1403.25,362 1403.25,329.75 1409.34,323.66 1456.69,323.66 1463,329.98 1463,458
  pour cut-out: 1493,475 1493,401.8 1494.93,399.87 1503.01,399.87 1503.01,369.84 1490.44,369.84 1490.44,338.15 1489,336.72 1489,303 1486,300 1465,300 1465,310.37 1476.12,321.49 1479.48,321.49 1479.48,482.48 1481,484
  pour cut-out: 1537.69,466.87 1538,466.55 1538,368.67
  pour cut-out: 1466,525
  pour cut-out: 1721,348.07 1721,176.4 1719.15,174.55 1711.47,174.55 1711.47,343.7 1708,347.16
  pour cut-out: 1711.47,418.05 1719.15,418.05 1721,416.2 1721,348.07 1711.47,338.53 1707,343 1693,343
  pour cut-out: 1707.26,342.74 1711.47,338.53 1711.47,318.05 1692.03,318.05 1673.98,300 1645,300 1645,332.02 1658.8,345.82
  pour cut-out: 1711.47,274.55 1711.47,218.05 1661.19,218.05 1645.99,233.26 1649.18,236.45 1649.18,283.57 1659.57,283.57 1663,287
  pour cut-out: 1649.18,141.66 1682.26,174.75 1649.36,174.75 1645.99,171.37
  pour cut-out: 1452.82,81.63 1452.82,42.7 1454.52,41 1502.63,41 1502.63,44.87 1497,50.5
  pour cut-out: 1463,176 1597,176 1600,173 1625.5,198.5 1625.5,200.89 1626.98,202.37 1632.81,202.37 1632.81,53.18 1620.63,41 1502.63,41 1462,81.63
  pour cut-out: 1463,176
  pour cut-out: 1440,180.24 1440,162.51 1452.82,149.69 1485.24,149.69 1491.1,155.55 1491.1,209 1489.44,209 1480.39,218.05 1474.93,212.59 1474.93,212.08
  pour cut-out: 1378.75,153.42 1365.49,140.17 1365.49,132 1360.59,132 1346,146.59 1349.17,149.76 1349.17,153.42
  pour cut-out: 1246,179.63 1243.66,179.63 1226.5,162.47 1234.97,154 1247.49,154 1251.25,150.25 1251.25,180.68 1249,182.93
  pour cut-out: 1251,141.42 1251.49,141.91 1251.49,150
  pour cut-out: 1251,141.42
  pour cut-out: 1202.61,160.01 1222.81,160.01 1225.82,157 1218.82,150 1200.17,150 1193,157.17
  pour cut-out: 1145.98,93.94 1147.77,92.16 1147.77,87.05 1145.28,87.05 1142.65,89.68
  pour cut-out: 1139,159.99 1165.36,159.99 1166.33,159.01 1163.93,156.6 1163.93,149.39 1141.9,149.39 1139,152.29
  pour cut-out: 1174.21,82.81 1193.9,82.81 1193.9,85.47 1189.37,90 1177.1,90
  pour cut-out: 1145.13,89.68 1142.65,89.68 1131,78.03 1131,73.1 1144,60.1 1144,45.49 1145.45,45.49 1147.77,43.18 1147.77,87.05
  pour cut-out: 1025.54,82.25 1025.6,82.19 1104.52,82.19 1098.14,88.57 1025,88.57
  pour cut-out: 996.39,159.44 996.58,159.44 1002.63,165.49 1005.12,163 1018,163 1018,157.53 1005.6,145.13
  pour cut-out: 946,157 945.65,157.35 884,157.35 884,158.9 929.1,204 932.37,200.73 932.37,196.24
  pour cut-out: 860.91,193 863,190.91 828.59,156.49 816.24,156.49 816.24,193
  pour cut-out: 1007.8,205 1059.18,205 1063,201.18 1040.73,178.91 999.6,178.91 999,178.31 997,180.31 997,201.5
  pour cut-out: 668,347.16 668.58,347.74 711,347.74 711,312.9 709.1,311 668,311
  pour cut-out: 646.48,363.95 651.69,363.95 673.64,342 674,342 674,341 668,335 655.56,347.44 653.84,347.44 653.84,354.87 646.9,361.81
  pour cut-out: 753.82,311.04 753.82,274 774,294.18 774,295
  pour cut-out: 747,150.24 747.15,150.08 747.15,126.49 758.01,126.49 756.51,127.98 756.51,156.5
  pour cut-out: 598.63,219.63 598.63,113.37 604,108 634,108 634,227.75 634.25,228
  pour cut-out: 568.49,232.52 579.2,221.81 593.24,221.81 593.53,221.51 598,225.99 598,235
  pour cut-out: 409.18,261.82 409.18,243.85 409,243.67 400.67,252 397,252 397,262.01 395,264.01
  pour cut-out: 507.21,502.18 522.62,517.59 537.41,517.59 537.41,426.18 537,425.77 517,425.77 517,430 485,462 491,468 506,468
  pour cut-out: 445.99,462.62 445.99,425.77 490.23,425.77 490.67,425.33 490.67,451 485.32,451 470,466.32
  pour cut-out: 399.59,407.59 427.82,407.59 449,428.78 451,426.78 451,386 523.37,386 530,379.37 530,339.69 541,328.69 541,318 515.6,318 511.45,322.15 470,322.15 470,264.83 466.27,261.09 454.65,261.09 454.65,276.48 445.13,286 448.51,289.39 448.51,306.87 454.65,313 448.51,319.13 448.51,323.66 410.88,323.66 410,324.54 410,334.51 417.49,342 417.49,389.69
  pour cut-out: 258.66,244.39 258.66,191.96 263.63,187 293.91,187 293.91,214.05 297,217.14 277,237.14 277,238
  pour cut-out: 265,311.57 265,264.01 294.5,234.51 298,234.51 298,321.37 292.87,326.5 272.36,326.5
Bottom Layer:
  pour cut-out: 776.16,473.25 776.16,451.75 788.73,439.18 840.82,439.18 862,418 865,421 875,421 875,463 878,466 846,498 776,498
  pour cut-out: 899.87,477 900.63,476.24 941,476.24 940,477.24 940,484 925.57,484 916,493.57 907.43,485 903.74,485
  pour cut-out: 916,510.9 946.31,510.9 947.63,509.58 943.88,505.83 918.83,505.83 918,505
  pour cut-out: 922.63,509.58
  pour cut-out: 898.67,493.57 898.67,478.2 899.87,477
  pour cut-out: 899.99,500.2
  pour cut-out: 1105.31,456.79 1105.11,457 1089.35,457 1077.58,468.77 1089.54,468.77
  pour cut-out: 1084,467.67 1087.33,467.67 1099,456
  pour cut-out: 1079,556.75 1079,521.66 1067.99,510.65 1067.99,491.63 1103.38,491.63 1118,506.26 1118,507.63 1113.37,507.63 1096,525 1100,529 1100,560
  pour cut-out: 1384.52,446.48 1392,446.48 1400,438.48 1400,437.72 1395.28,433 1387.28,441 1380,441
  pour cut-out: 1347.33,501 1328.13,501 1314.23,487.09 1314.23,454.03 1338.18,430.08 1338.18,402.56 1390.56,402.56 1400,412 1400,438 1393,438 1384.52,446.48 1347,446.48
  pour cut-out: 1634,460 1640.49,453.51 1691.51,453.51 1693,455 1693,461
  pour cut-out: 1676.28,556 1737.99,556 1734.37,552.38 1734.37,453.51 1673.84,453.51 1669.34,458
  pour cut-out: 1634,556 1634,460 1635.41,460 1641.9,453.51 1672.18,453.51 1676.67,458 1676.28,458.39 1676.28,556
  pour cut-out: 1642,546
  pour cut-out: 1643.74,540.26
  pour cut-out: 1734.37,557 1734.37,453.51 1803,453.51 1790,466.51 1790,507.5 1770.76,526.74 1770.76,550.05 1764.3,556.51
  pour cut-out: 1738.99,557
  pour cut-out: 1729,556.51
  pour cut-out: 1674,23.82 1716.18,23.82 1717,23 1719,25 1719,43.67 1699.41,43.67 1693.74,38 1686,38
  pour cut-out: 1679.15,73.25 1679.15,58.52 1662.63,42 1663.41,41.22 1663.41,38 1679,38 1693,52 1693,77
  pour cut-out: 1723.18,77.91 1718.52,73.25 1719,72.77 1719,43.67 1713,37.67 1695,37.67 1695,58 1707.28,70.28 1707.28,76.28 1710,79 1708,81 1708,118.32 1680.73,118.32 1679.15,116.75 1678,117.9 1678,130.82 1698.82,130.82 1723.18,155.18
  pour cut-out: 1660.3,378.97 1661.3,378.97 1667.01,373.25 1718.52,373.25 1718.52,416.75 1663.41,416.75 1660.3,413.63
  pour cut-out: 1656.68,311.01 1656.68,311.68 1682,337 1682,305
  pour cut-out: 1635,289.33 1656.68,311.01 1673.42,311.01 1679.15,316.75 1679.15,373.25 1718.52,373.25 1718.52,273.25 1724.89,273.25 1726,272.14 1723.18,269.32 1723.18,216.75 1720.49,219.44 1720.49,240.49 1716.51,240.49 1707.26,249.74 1707.26,265.26 1697.92,265.26 1674.18,289 1635,289
  pour cut-out: 1340,312.68 1394.96,312.68 1419.27,288.37 1654.78,288.37 1671,272.14 1666,267.14 1666,243.84 1483.84,243.84 1461,221 1454,228 1337,228 1337,311 1340,314
  pour cut-out: 1471,202 1471,146 1467,142 1469,140 1698,140 1698,152.98 1705.77,160.74 1705.77,205
  pour cut-out: 1321,161 1320.72,161.28 1320.72,179 1321,179 1334,166 1334,156
  pour cut-out: 1321,161 1321,85.37 1324.37,82 1354,82 1354,82.58 1369,97.58 1369,130.82 1367.65,130.82 1337.48,161
  pour cut-out: 930.75,143.34 931,143.09 931,104.4 986.33,104.4 986.75,103.98 986.75,111.66 949.91,111.66 943.25,118.32 943.25,143.35
  pour cut-out: 1192.2,397.82 1192.2,353.8 1195,351 1196.75,352.75 1241,352.75 1241,399 1236.67,403.33 1205.9,403.33 1197.57,395
  pour cut-out: 1166.84,354.75 1239,354.75 1241,352.75 1241,236.13 1166.96,236.13 1160.18,242.91 1160.18,279.75 1155.24,279.75 1147.49,287.5 1151,291.01 1151,307.67 1166.84,323.5
  pour cut-out: 1072,357 1072,360 1092,380 1092,398.26 1081.06,398.26 1064.18,381.38 1064.18,353.75 1070.85,353.75
  pour cut-out: 1039.16,353.75 1039.16,397.66 1039,397.82 1044.71,397.82 1049,393.53 1049,353
  pour cut-out: 924.18,322.74 899.87,322.74 895.44,327.18 924.18,355.91
  pour cut-out: 921.49,366.2
  pour cut-out: 921.49,366.2
  pour cut-out: 936,416.18 883.57,416.18 884,415.75 884,373.25 901.46,373.25 915,359.72 921.49,366.2 921.49,397
  pour cut-out: 847.82,369 847.82,335 878.28,335 877,336.28 877,356.2
  pour cut-out: 589.49,340 589.49,316.18 592.68,313 576,313 576,320.29 573.89,322.41
  pour cut-out: 614.33,489 615,489.67 615,557 591.18,557 557.49,523.31 557.49,467.51 559,466 560.67,467.67 614,467.67
  pour cut-out: 714,228 730.25,244.25 733.16,244.25 733.16,256.82 729.99,260 711,260 711,233 709,231
  pour cut-out: 662.43,260.63 662.43,282.25 663,282.82 663.5,282.32 733.16,282.32 733.16,275.18 732.46,274.48 688.11,274.48 688.11,269.81 678.93,260.63
  pour cut-out: 567.49,117 568,117.51 568,136.5 561.76,136.5 561.75,136.51 557.24,132 556.59,132
  pour cut-out: 441,181.61 442.05,182.66 451,182.66 451,33.08 454.08,30 476.18,30 481.5,24.68 479.32,22.51 422.49,22.51 420,25 424,29 430.49,29 430.49,186
  pour cut-out: 595.69,260.63 595.68,260.63 595.68,282.65 592,286.33 590.68,285.01 572.31,285.01 572.31,260.31 572,260
  pour cut-out: 597,282.75
  pour cut-out: 451,292.28
  pour cut-out: 456,293.75
  pour cut-out: 505.67,292.69 505.67,267.67 497.38,259.38 497.38,245.62 501,242 505.72,246.72 541.72,246.72 553.18,258.18 576,258.18 576,281.32 572.31,285.01 513.35,285.01
  pour cut-out: 506,326.51 505.67,326.17 505.67,292.69 545.69,292.69 551,298 551,331
  pour cut-out: 453.88,251.85 453.73,252 423,252 423,251.49 430.49,244 430.49,210.6 432.82,210.6 435.49,207.93 436.7,209.14 465.98,209.14 465.98,220.48 468.5,223 467.5,224 458.61,224 458.61,248.91 458,249.52
VCC03 (plane layer: these items are gaps in the copper):
  lines w10: 0,439 641,439 641,21 641,0

## Silkscreen, mask and mechanical layers (free items; w line width, h text height)
Top Overlay:
  text "GND" at 1036,568 h20
  text "SWO" at 1085,568 h20
  text "SCLK" at 1134,568 h20
  text "SWDIO" at 1186,568 h20
  text "3.3V" at 1251,568 h20
  text "3.3V" at 1775.83,480 h25 r90
  text "SWDIO" at 1775.83,362 h25 r90
  text "SWCLK" at 1776,258.5 h25 r90
  text "SWO" at 1775.83,172 h25 r90
  text "GND" at 1775.83,77 h25 r90
Bottom Overlay:
  drawing of 416 lines, arcs and shapes, not listed
  text "5V" at 1780,509 h30 r90
  text "RXD" at 1780,410 h30 r90
  text "TXD" at 1780,310 h30 r90
  text "MOSI" at 1780,216 h30 r90
  text "RST" at 1780,105 h30 r90
Mechanical 1:
  the board outline again, w10